# Altium PCB pcb.PcbDoc (part 6 of 6)
Units mm, origin at the board's own origin, x right, y up, seen from the top; angles counter-clockwise.
Board outline 85.44 x 182.72 mm, 2 copper layers (Top Layer, Bottom Layer); 68 components, 54 nets, 232 pads, 184 vias.
Unrouted connection lines stored in the file: 53.
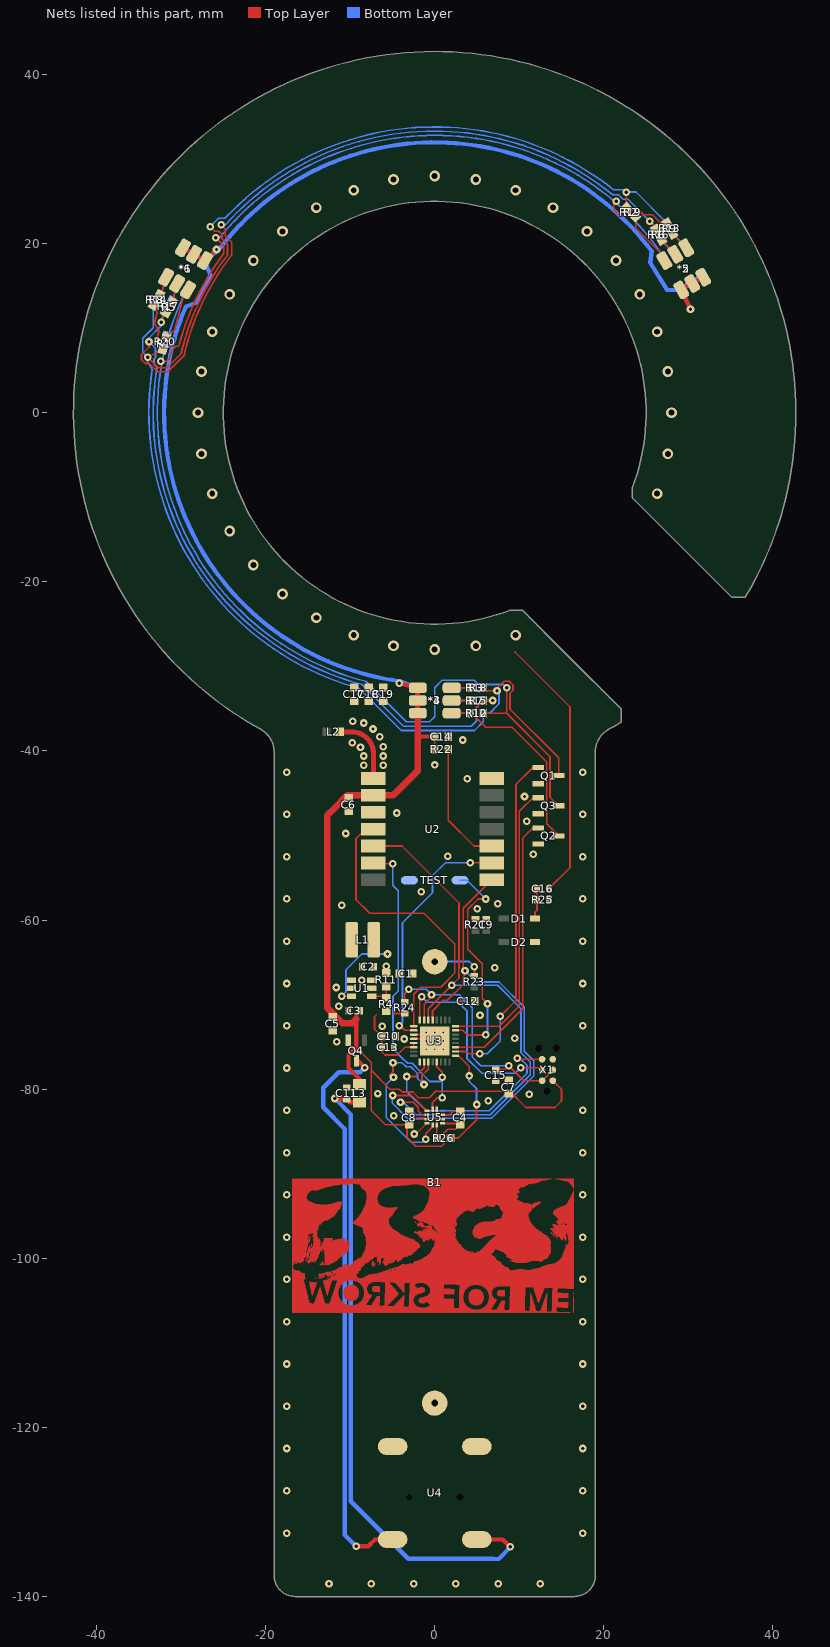
[diagram p6: the nets of this part, all layers, seen from the top]

## Via types
v1: diameter 0.9, hole 0.4, Top Layer to Bottom Layer, 143 vias
v2: diameter 1.27, hole 0.7, Top Layer to Bottom Layer, 32 vias
v3: diameter 0.5, hole 0.2, Top Layer to Bottom Layer, 9 vias

## Nets (pads, with @x,y where several pads share a name; then routed paths per layer and width w, separated by ;. In a path a pad name is that pad's centre, name@x,y a point inside that pad or via, vN(x,y) a via of type N, cw(c..) or ccw(c..) an arc to the next point about the centre after c; other vN are vias at no path point) (continued)
GND: (continued)
  Top Layer w0.025: 16.388,-105.807 16.464,-105.807 ; 16.388,-105.782 16.464,-105.782 ; 16.388,-105.756 16.464,-105.756 ; 16.388,-105.731 16.464,-105.731 ; 16.388,-105.705 16.464,-105.705 ; 16.388,-105.68 16.464,-105.68 ; 16.388,-105.655 16.464,-105.655 ; 16.388,-105.629 16.464,-105.629 ; 16.388,-105.604 16.464,-105.604 ; 16.388,-105.578 16.464,-105.578 ; 16.388,-105.553 16.464,-105.553 ; 16.388,-105.528 16.464,-105.528 ; 16.388,-105.502 16.464,-105.502 ; 16.388,-105.477 16.464,-105.477 ; 16.388,-105.451 16.464,-105.451 ; 16.388,-105.426 16.464,-105.426 ; 16.388,-105.401 16.464,-105.401 ; 16.388,-105.375 16.464,-105.375 ; 16.388,-92.091 16.464,-92.091 ; 16.388,-92.066 16.464,-92.066 ; 16.388,-91.608 16.464,-91.608 ; 16.388,-91.583 16.464,-91.583 ; 16.413,-105.35 16.464,-105.35 ; 16.413,-105.324 16.464,-105.324 ; 16.413,-105.299 16.464,-105.299 ; 16.413,-105.274 16.464,-105.274 ; 16.413,-105.248 16.464,-105.248 ; 16.413,-105.223 16.464,-105.223 ; 16.413,-105.197 16.464,-105.197 ; 16.413,-105.172 16.464,-105.172 ; 16.413,-105.147 16.464,-105.147 ; 16.413,-105.121 16.464,-105.121 ; 16.413,-105.096 16.464,-105.096 ; 16.413,-105.07 16.464,-105.07 ; 16.413,-105.045 16.464,-105.045 ; 16.413,-105.02 16.464,-105.02 ; 16.413,-104.994 16.464,-104.994 ; 16.413,-104.969 16.464,-104.969 ; 16.413,-104.943 16.464,-104.943 ; 16.413,-104.918 16.464,-104.918 ; 16.413,-104.893 16.464,-104.893 ; 16.413,-104.867 16.464,-104.867 ; 16.413,-104.842 16.464,-104.842 ; 16.413,-104.816 16.464,-104.816 ; 16.413,-104.791 16.464,-104.791 ; 16.413,-104.766 16.464,-104.766 ; 16.413,-104.74 16.464,-104.74 ; 16.413,-104.715 16.464,-104.715 ; 16.413,-104.689 16.464,-104.689 ; 16.413,-104.664 16.464,-104.664 ; 16.413,-92.04 16.464,-92.04 ; 16.413,-92.015 16.464,-92.015 ; 16.413,-91.659 16.464,-91.659 ; 16.413,-91.634 16.464,-91.634 ; 16.439,-104.639 16.464,-104.639 ; 16.439,-104.613 16.464,-104.613 ; 16.439,-104.588 16.464,-104.588 ; 16.439,-104.562 16.464,-104.562 ; 16.439,-104.537 16.464,-104.537 ; 16.439,-104.512 16.464,-104.512 ; 16.439,-104.486 16.464,-104.486 ; 16.439,-104.461 16.464,-104.461 ; 16.439,-104.435 16.464,-104.435 ; 16.439,-104.41 16.464,-104.41 ; 16.439,-104.385 16.464,-104.385 ; 16.439,-104.359 16.464,-104.359 ; 16.439,-104.334 16.464,-104.334 ; 16.439,-104.308 16.464,-104.308 ; 16.439,-104.283 16.464,-104.283 ; 16.439,-104.258 16.464,-104.258 ; 16.439,-104.232 16.464,-104.232 ; 16.439,-104.207 16.464,-104.207 ; 16.439,-104.181 16.464,-104.181 ; 16.439,-104.156 16.464,-104.156 ; 16.439,-104.131 16.464,-104.131 ; 16.439,-104.105 16.464,-104.105 ; 16.439,-104.08 16.464,-104.08 ; 16.439,-104.054 16.464,-104.054 ; 16.439,-104.029 16.464,-104.029 ; 16.439,-104.004 16.464,-104.004 ; 16.439,-103.978 16.464,-103.978 ; 16.439,-103.953 16.464,-103.953 ; 16.439,-103.927 16.464,-103.927 ; 16.439,-91.989 16.464,-91.989 ; 16.439,-91.964 16.464,-91.964 ; 16.439,-91.761 16.464,-91.761 ; 16.439,-91.735 16.464,-91.735 ; 16.439,-91.71 16.464,-91.71 ; 16.439,-91.685 16.464,-91.685
  Top Layer w0.2: C10.1@-4.634,-73.887 C10.1@-4.534,-73.787 ; U3.28@-2.475,-74.045 U3.33@-0.25,-74.045 ; U3.27@-2.475,-73.545 -0.75,-73.545 U3.33@-0.25,-74.045 ; v1(-2.4,-85.3) -2.217,-85.3 -0.967,-84.05 U5.4@-0.925,-84.05 ; v3(0,-74.295) U3.33@-0.25,-74.045 ; U5.11@0.25,-82.375 0.25,-83.029 ; U5.8@0.925,-83.55 0.263,-83.55 0.25,-83.537 0.25,-83.029 ; C4.1@3,-82.6 2.16,-82.6 1.71,-83.05 U5.9@0.925,-83.05 0.271,-83.05 0.25,-83.029
  other v1: -12.5,-138.5 -7.5,-138.5 -2.5,-138.5 2.5,-138.5 7.5,-138.5 12.5,-138.5 -17.5,-132.5 17.5,-132.5 -17.5,-127.5 17.5,-127.5 -17.5,-122.5 17.5,-122.5 -17.5,-117.5 17.5,-117.5 -17.5,-112.5 17.5,-112.5 -17.5,-107.5 17.5,-107.5 -17.5,-102.5 17.5,-102.5 -17.5,-97.5 17.5,-97.5 -17.5,-92.5 17.5,-92.5 -17.5,-87.5 17.5,-87.5 -4.826,-83.134 -17.5,-82.5 17.5,-82.5 6.325,-81.35 11.201,-80.62 -6.731,-80.518 -17.5,-77.5 17.5,-77.5 -11.582,-74.397 -3.581,-74.066 9.45,-74 -6.198,-72.542 -17.5,-72.5 17.5,-72.5 5.359,-71.247 -11.328,-70.206 -11.633,-67.97 -17.5,-67.5 17.5,-67.5 -8.636,-67.107 7.112,-65.659 -5.74,-65.481 -17.5,-62.5 17.5,-62.5 5.029,-58.649 -10.973,-58.268 7.468,-58.064 -17.5,-57.5 17.5,-57.5 -1.575,-56.667 -17.5,-52.5 17.5,-52.5 1.524,-52.451 11.659,-52.222 -10.541,-49.759 10.871,-48.336 -17.5,-47.5 17.5,-47.5 -4.496,-47.346 10.617,-45.39 3.861,-43.282 -17.5,-42.5 17.5,-42.5 -8.4,-41.7 -6.1,-41.7 0,-41.656 -8.4,-40.6 -6.1,-40.6 -8.776,-39.566 -6.1,-39.5 -9.729,-39.016 3.302,-38.71 -6.5,-38.3 -7.3,-37.4 -8.4,-36.7 -9.7,-36.5
  other v3: -1,-75.295 0,-75.295 1,-75.295 -1,-74.295 1,-74.295 -1,-73.295 0,-73.295 1,-73.295
INT: U2.11 U3.25 | length 36.7
  Top Layer w0.2: U2.11@-7.25,-49.25 -8.15,-49.25 -9.3,-50.4 -9.3,-57.578 -7.696,-59.182 -1.27,-59.182 2.388,-62.84 2.388,-66.268 0.71,-67.945 -1.651,-67.945 -2.475,-68.769 U3.25@-2.475,-72.545
INT1: U3.3 U5.5 | length 23.5
  Top Layer w0.2: v1(-4.928,-76.86) -4.928,-77.953 -5.334,-78.359 -5.105,-78.588 v1(-4.877,-78.588) ; v1(-1.27,-79.451) -1.499,-79.223 -1.499,-78.384 -0.75,-77.636 U3.3@-0.75,-76.77 ; v1(-1.067,-85.903) -1.067,-85.268 -0.25,-84.451 U5.5@-0.25,-84.225
  Bottom Layer w0.2: v1(-4.928,-76.86) -3.861,-76.86 -3.371,-77.35 -2.824,-77.35 -2.025,-78.149 -2.025,-78.696 v1(-1.27,-79.451) ; v1(-4.877,-78.588) -5.728,-79.439 -5.728,-83.349 -2.794,-86.284 -1.448,-86.284 v1(-1.067,-85.903)
INT2: R26.2 U5.6 | length 1.6
  Top Layer w0.2: R26.2@0.165,-85.827 0.25,-85.742 U5.6@0.25,-84.225
IRQ: U2.2 U3.26 | length 29.2
  Top Layer w0.2: v1(-4.191,-72.517) -4.064,-72.517 -3.536,-73.045 U3.26@-2.475,-73.045 ; v1(4.191,-53.213) 6.713,-53.213 U2.2@6.75,-53.25
  Bottom Layer w0.2: v1(-4.191,-72.517) -3.81,-72.136 -3.81,-60.325 -0.254,-56.769 -0.254,-54.737 1.27,-53.213 v1(4.191,-53.213) v1@4.064,-53.34
LED_B: Q3.3 R8.2 R9.2 R10.2 R18.2 R19.2 R20.2 | length 181.9
  Top Layer w0.2: R8.2@-33.158,12.51 -32.801,11.893 -33.145,10.61 -32.606,9.677 -32.873,8.679 -32.672,8.331 -30.684,7.798 -30.593,7.85 ; v1@-32.224,5.827 -31.41,6.297 -31.141,7.302 -30.593,7.85 ; v1(-25.908,20.696) -24.936,19.724 -24.936,18.858 ccw(c0,0) -30.262,7.85 -30.593,7.85 ; R10.2@5.753,-35.56 8.509,-35.56 ; v1(8.509,-32.512) 8.509,-35.56 ; Q3.3@14.662,-46.482 13.637,-45.457 13.637,-40.688 8.509,-35.56 ; v1(21.463,24.994) 21.158,24.994 21.158,24.054 21.894,23.318 22.739,23.318 23.551,24.13 23.953,24.13 24.683,23.399 25.761,23.399 26.7,22.461 R9.2@27.413,22.461
  Bottom Layer w0.2: R20.2@-31.958,7.383 ccw(c0,0) -8.165,-31.767 -3.376,-36.557 -0.616,-36.557 0,-35.941 0,-32.512 0.862,-31.65 4.665,-31.65 5.207,-32.192 5.207,-33.058 R18.2@5.753,-32.512 6.122,-32.143 8.14,-32.143 v1(8.509,-32.512) ; v1(-25.908,20.696) -25.652,20.44 cw(c0,0) R19.2@22.373,23.985
  other v1: -32.377,6.091
LED_G: Q2.3 R5.2 R6.2 R7.2 R15.2 R16.2 R17.2 | length 186.8
  Top Layer w0.2: v1(-33.782,8.382) -33.782,7.77 -34.672,6.88 -34.672,6.258 -34.233,5.819 -33.759,5.819 -32.766,4.826 -31.556,4.826 -29.667,6.715 -29.649,6.715 cw(c0,0) -24.016,18.638 -24.003,18.651 -24.003,20.193 -24.758,20.948 -24.758,21.728 v1(-25.264,22.234) ; v1(-32.34,10.716) R5.2@-32.105,11.593 ; R5.2@-31.769,11.753 -31.769,12.465 ; v1(6.858,-34.036) R7.2@5.753,-34.036 4.953,-34.836 4.953,-36.134 6.03,-37.211 9.144,-37.211 13.237,-41.304 13.237,-48.613 Q2.3@14.662,-50.038 ; v1(25.451,22.649) 26.092,22.008 R6.2@26.092,21.724
  Bottom Layer w0.2: R17.2@-31.847,11.712 ccw(c-31.474,11.066) -32.195,11.259 v1(-32.34,10.716) -32.34,10.281 -33.782,8.839 v1(-33.782,8.382) -33.02,7.62 -33.02,6.528 -33.198,6.35 -33.198,5.717 -32.842,5.362 ccw(c-0.087,-0.05) -8.636,-32.13 ; v1(-25.264,22.234) -24.745,22.234 cw(c0,0.1) 21.065,25.761 ; -8.636,-32.131 -3.683,-37.084 4.318,-37.084 4.953,-36.449 4.953,-34.836 R15.2@5.753,-34.036 v1(6.858,-34.036) ; 21.081,25.781 21.742,25.781 22.276,25.248 22.852,25.248 v1(25.451,22.649) 25.848,22.252 cw(c25.32,21.724) R16.2@26.067,21.724
LED_R: Q1.3 R1.2 R2.2 R3.2 R12.2 R13.2 R14.2 | length 184.7
  Top Layer w0.2: R1.2@-32.36,7.471 v1(-33.922,6.569) -32.687,5.334 -31.653,5.334 -29.996,6.991 cw(c0,0) -24.499,18.666 -24.499,19.927 -25.158,20.586 -25.158,21.094 -25.527,21.463 -26.035,21.463 v1(-26.543,21.971) ; R3.2@5.753,-32.512 6.134,-32.893 v1(7.366,-32.893) 7.366,-32.594 8.198,-31.762 8.82,-31.762 9.259,-32.201 9.259,-32.823 8.909,-33.173 8.909,-35.071 14.662,-40.824 Q1.3@14.662,-42.926 ; R2.2@22.345,24.289 R2.2@22.65,24.289 v1(22.65,26.093)
  Bottom Layer w0.2: v1@-34.264,6.661 v1(-33.922,6.569) -34.532,7.179 -34.532,8.8 -33.293,10.039 R14.2@-33.293,12.642 ; v1@-34.027,6.175 -33.412,5.109 ccw(c0,0) -9.001,-32.58 -8.949,-32.58 -3.937,-37.592 4.699,-37.592 5.753,-36.538 R12.2@5.753,-35.535 6.502,-35.535 7.608,-34.429 7.608,-33.135 v1(7.366,-32.893) ; v1(-26.543,21.971) -26.543,22.016 -25.572,22.987 -24.813,22.987 -23.771,24.028 cw(c0,0) 21.13,26.381 22.362,26.381 v1(22.65,26.093) 23.8,26.093 R13.2@27.4,22.493
LOOP: C16.1 C17.2 C18.2 C19.2 | length 31.7
  Top Layer w0.2: 9.5,-28.3 16,-34.8 16,-53.8 C16.1@13.5,-56.3
  other v2: 0,-28 -4.862,-27.575 4.862,-27.575 -9.577,-26.311 9.577,-26.311 -14,-24.249 -17.998,-21.449 -21.449,-17.998 -24.249,-14 -26.311,-9.577 26.311,-9.577 -27.575,-4.862 27.575,-4.862 -28,0 28,0 -27.575,4.862 27.575,4.862 -26.311,9.577 26.311,9.577 -24.249,14 24.249,14 -21.449,17.998 21.449,17.998 -17.998,21.449 17.998,21.449 -14,24.249 14,24.249 -9.577,26.311 9.577,26.311 -4.862,27.575 4.862,27.575 0,28
MISO: U2.1 U3.21 U5.1 | length 62.5
  Top Layer w0.2: v1(-4.978,-80.747) -2.732,-80.747 -0.929,-82.55 U5.1@-0.925,-82.55 ; U3.21@-0.25,-71.82 -0.25,-70.735 0.991,-69.494 1.499,-69.494 3.378,-67.615 3.378,-66.675 3.581,-66.472 v1(3.581,-65.989) ; v1@3.378,-65.989 3.378,-58.622 U2.1@6.75,-55.25
  Bottom Layer w0.2: v1(-4.978,-80.747) -5.029,-80.797 -5.029,-81.636 -3.232,-83.433 6.726,-83.433 11.71,-78.448 11.71,-76.626 10.6,-75.516 10.6,-70.315 7.602,-67.316 4.909,-67.316 v1(3.581,-65.989)
MOSI: U2.12 U3.22 U5.2 | length 67.8
  Top Layer w0.2: U2.12@-7.25,-51.25 -3.868,-51.25 2.87,-57.988 2.87,-65.64 2.831,-65.679 2.831,-66.3 2.87,-66.339 2.87,-66.853 v1(2.007,-67.716) -0.75,-70.473 U3.22@-0.75,-71.82 ; v1(-4.039,-81.534) -2.54,-81.534 -1.93,-82.144 -1.93,-82.575 -1.456,-83.05 U5.2@-0.925,-83.05
  Bottom Layer w0.2: v1(-4.039,-81.534) -3.734,-81.534 -2.235,-83.033 6.56,-83.033 11.31,-78.283 11.31,-76.791 10.2,-75.681 10.2,-70.48 7.436,-67.716 v1(2.007,-67.716)
Net*1_1: *1.1 R8.1 | length 2.2
  Top Layer w0.2: R8.1@-32.358,13.896 -32.334,13.985 *1.1@-31.79,16.017
Net*1_2: *1.2 R5.1 | length 2.2
  Top Layer w0.2: R5.1@-31.06,13.12 -31.049,13.16 -31.026,13.247 *1.2@-30.483,15.271
Net*1_3: *1.3 R1.1 | length 6.1
  Top Layer w0.2: R1.1@-31.946,9.016 -31.874,9.058 -31.679,9.17 -30.802,9.677 *1.3@-29.563,14.302
Net*2_1: *2.1 R9.1 | length 2.2
  Top Layer w0.2: R9.1@28.213,21.075 29.766,19.522 *2.1@29.766,19.495
Net*2_2: *2.2 R6.1 | length 2.2
  Top Layer w0.2: R6.1@26.892,20.338 28.467,18.764 *2.2@28.467,18.745
Net*2_3: *2.3 R2.1 | length 6.6
  Top Layer w0.2: R2.1@23.781,23.158 23.781,21.837 27.168,18.451 *2.3@27.168,17.995
Net*3_1: *3.1 R10.1 | length 2.2
  Top Layer w0.2: *3.1@2,-35.525 2.035,-35.56 R10.1@4.153,-35.56
Net*3_2: *3.2 R7.1 | length 2.2
  Top Layer w0.2: *3.2@2,-34.025 2.011,-34.036 R7.1@4.153,-34.036
Net*3_3: *3.3 R3.1 | length 2.2
  Top Layer w0.2: *3.3@2,-32.525 2.013,-32.512 R3.1@4.153,-32.512
Net*4_1: *4.1 R18.1 | length 2.2
  Bottom Layer w0.2: *4.1@2,-32.55 2.038,-32.512 R18.1@4.153,-32.512
Net*4_2: *4.2 R15.1 | length 2.2
  Bottom Layer w0.2: *4.2@2,-34.05 2.014,-34.036 R15.1@4.153,-34.036
Net*4_3: *4.3 R12.1 | length 2.2
  Bottom Layer w0.2: *4.3@2,-35.55 2.015,-35.535 R12.1@4.153,-35.535
Net*5_1: *5.1 R19.1 | length 6
  Bottom Layer w0.2: R19.1@23.499,22.839 cw(c0,-0.044) *5.1@27.257,18.201
Net*5_2: *5.2 R16.1 | length 2.3
  Bottom Layer w0.2: R16.1@26.8,20.307 cw(c26.8,20.139) 26.919,20.258 *5.2@28.445,18.732
Net*5_3: *5.3 R13.1 | length 2.3
  Bottom Layer w0.2: R13.1@28.2,21.107 29.744,19.563 *5.3@29.744,19.482
Net*6_1: *6.1 R20.1 | length 6.8
  Bottom Layer w0.2: R20.1@-31.529,8.932 cw(c0.038,0.022) *6.1@-29.391,14.505 ; *6.1@-29.337,13.77 -29.306,13.801 -29.201,13.801 *6.1@-29.201,14.518
Net*6_2: *6.2 R17.1 | length 2.8
  Bottom Layer w0.2: R17.1@-31.003,13.184 -30.989,13.237 *6.2@-30.5,15.062 ; *6.2@-30.5,14.675 *6.2@-30.5,15.062 ; *6.2@-30.5,15.268 *6.2@-30.5,15.062 ; *6.2@-30.445,15.268 -30.449,15.254 *6.2@-30.5,15.062
Net*6_3: *6.3 R14.1 | length 2.7
  Bottom Layer w0.2: R14.1@-32.379,13.868 -32.349,13.98 -32.347,13.989 *6.3@-31.814,15.977 ; *6.3@-31.799,15.458 *6.3@-31.799,16.018
NetC11_2: C11.2 L3.1 U4.1 | length 78.1
  Top Layer w0.5: v1(-11.811,-81.102) -11.713,-81.2 C11.2@-10.4,-81.2 -10.05,-81.55 L3.1@-8.9,-81.55 ; U4.1@4.975,-133.25 8.053,-133.25 v1(8.915,-134.112)
  Bottom Layer w0.5: v1(-11.811,-81.102) -9.931,-82.982 -9.931,-128.727 -3.124,-135.534 6.883,-135.534 6.909,-135.56 7.569,-135.56 8.915,-134.214 v1(8.915,-134.112)
NetC16_2: C16.2 D1.1 R25.2 | length 3.6
  Top Layer w0.2: D1.1@11.864,-59.817 11.864,-59.057 12.1,-58.821 R25.2@12.1,-57.6 C16.2@12.1,-56.3
NetL1_2: L1.2 U1.1
NetL2_1: L2.1 U2.8 | length 8.4
  Top Layer w0.6: L2.1@-11.2,-37.75 -9.79,-37.75 cw(c-9.79,-40.29) -7.25,-40.29 U2.8@-7.25,-43.25
NetQ4_3: Q4.3 U4.2 U4.3 U4.4 | length 67.8
  Top Layer w0.5: v1(-9.296,-134.061) -7.861,-134.061 -7.05,-133.25 U4.4@-4.975,-133.25 ; Q4.3@-9.271,-76.638 -9.062,-76.638 v1(-8.255,-77.445) ; U4.3@-5.025,-122.2 U4.3@-4.975,-122.25
  Bottom Layer w0.5: v1(-9.296,-134.061) -10.631,-132.726 -10.631,-84.695 -13.183,-82.144 -13.183,-79.832 -11.354,-78.003 -8.814,-78.003 v1(-8.255,-77.445)
NetR4_1: R4.1 R11.2 U1.4 | length 3.1
  Top Layer w0.2: U1.4@-7.436,-69.022 -5.87,-69.022 R4.1@-5.715,-69.177 R11.2@-5.715,-67.856
NetR22_1: R22.1 U2.3 | length 14.8
  Top Layer w0.2: R22.1@1.6,-39.8 1.6,-48.2 4.65,-51.25 U2.3@6.75,-51.25
NetR26_1: R26.1 U3.9 | length 12.8
  Top Layer w0.2: R26.1@1.867,-85.776 2.798,-85.776 4.953,-83.621 v1(4.953,-81.813) ; U3.9@2.475,-76.045 2.811,-76.045 4.089,-77.324 4.089,-78.41 v1(4.064,-78.435)
  Bottom Layer w0.2: v1(4.064,-78.435) 4.064,-79.045 4.953,-79.934 v1(4.953,-81.813)
NetSW1_1: TEST.1 U3.15 | length 26.3
  Top Layer w0.2: U3.15@2.475,-73.045 2.495,-73.025 3.302,-73.025 3.861,-73.584 v1(6.045,-73.584) ; v1(6.02,-57.506) 5.112,-57.506 3.912,-58.706 3.912,-63.449 5.639,-65.176 5.639,-69.266 v1(6.248,-69.875)
  Bottom Layer w0.2: TEST.1@3,-55.3 3.814,-55.3 v1(6.02,-57.506) ; v1(6.045,-73.584) 6.248,-73.381 v1(6.248,-69.875)
NetU3_24: U3.24 X1.4 | length 25
  Top Layer w0.2: U3.24@-1.75,-71.82 -1.75,-69.314 v1(-1.524,-69.088) ; v1(10.16,-77.47) 12.446,-77.47 X1.4@12.7,-77.724
  Bottom Layer w0.2: v1(-1.524,-69.088) -0.889,-69.723 2.794,-69.723 3.81,-70.739 3.81,-76.327 5.588,-78.105 9.525,-78.105 v1(10.16,-77.47) ; v1(10.16,-77.47) 10.287,-77.343 10.287,-77.597 v1(10.16,-77.47)
PWM_B: Q3.1 U3.16 | length 34.5
  Top Layer w0.2: U3.16@2.475,-72.545 7.637,-72.545 10.014,-70.168 10.014,-47.136 11.618,-45.532 Q3.1@12.262,-45.532
PWM_G: Q2.1 U3.11 | length 32.4
  Top Layer w0.2: U3.11@2.475,-75.045 5.854,-75.045 10.414,-70.485 10.414,-50.292 11.618,-49.088 Q2.1@12.262,-49.088
PWM_R: Q1.1 U3.10 | length 41.2
  Top Layer w0.2: U3.10@2.475,-75.545 3.79,-75.545 4.064,-75.819 v1(5.334,-75.819) ; Q1.1@12.262,-41.976 11.593,-41.976 9.614,-43.955 9.614,-69.507 v1(7.747,-71.374) ; v1(7.747,-71.374) 7.62,-71.501 7.62,-71.247 v1(7.747,-71.374)
  Bottom Layer w0.2: v1(5.334,-75.819) 6.223,-75.819 7.747,-74.295 v1(7.747,-71.374)
RST: C15.2 R24.1 U3.23 X1.2 X1.3 | length 32.2
  Top Layer w0.2: R24.1@-3.556,-69.658 -3.556,-68.707 v1(-3.048,-68.199) ; U3.23@-1.25,-71.82 -1.25,-69.957 -0.381,-69.088 v1(-0.381,-68.834) ; C15.2@7.239,-77.659 8.32,-77.659 v1(8.763,-77.216) 10.541,-78.994 X1.2@12.7,-78.994 X1.3@13.97,-77.724
  Bottom Layer w0.2: v1(-3.048,-68.199) -1.016,-68.199 v1(-0.381,-68.834) 2.921,-68.834 4.445,-70.358 4.445,-76.2 5.461,-77.216 v1(8.763,-77.216)
RXD: U3.1
SCK: U2.13 U3.5 U5.12 | length 39.9
  Top Layer w0.2: U2.13@-7.25,-53.25 -7.16,-53.34 v1(-4.953,-53.34) ; U5.12@-0.25,-82.375 -0.25,-81.55 0.3,-81 v1(0.9,-81) ; U3.5@0.25,-76.77 0.25,-77.361 0.9,-78.011 v1(0.9,-78.6)
  Bottom Layer w0.2: v1(-4.953,-53.34) -4.953,-55.88 -4.318,-56.515 -4.318,-68.384 -4.941,-69.007 -4.941,-75.221 -3.702,-76.46 -3.695,-76.46 -3.206,-76.95 -2.658,-76.95 -1.625,-77.983 -1.625,-78.036 -0.559,-79.102 0.688,-79.102 v1@0.9,-78.89 ; v1(0.9,-81) 0.9,-81.121 0.661,-81.361 0.661,-81 0.9,-80.761 v1@0.9,-78.89 ; v1(0.9,-78.6) v1@0.9,-78.89
TXD: U3.2 X1.6 | length 27.4
  Top Layer w0.2: v1(-3.3,-78.5) -2.3,-78.5 -1.25,-77.45 U3.2@-1.25,-76.77 ; v1(9.779,-76.327) 9.906,-76.454 X1.6@12.7,-76.454
  Bottom Layer w0.2: v1(-3.3,-78.5) -3.3,-80.3 -1.037,-82.563 6.464,-82.563 10.91,-78.117 10.91,-77.159 10.078,-76.327 v1(9.779,-76.327)
VBAT: B1.2 C1.2 C2.2 L1.1 R23.2 U1.3 U1.6 | length 16.3
  Top Layer w0.2: v1(-11,-69) -9.858,-69 cw(c-9.858,-69.022) U1.3@-9.836,-69.022 ; R23.2@4.699,-66.61 v1(4.699,-65.532)
  Bottom Layer w0.2: v1(-11,-69) -10.5,-68.5 -10.5,-65.9 -8.608,-64.008 v1(-5.588,-64.008) v1@-5.5,-63.92 ; B1.2@0,-64.9 4.067,-64.9 v1(4.699,-65.532)
VCPU: *1.4 *1.5 *1.6 *2.4 *2.5 *2.6 *3.4 *3.5 *3.6 *4.4 *4.5 *4.6 *5.4 *5.5 *5.6 *6.4 *6.5 *6.6 C3.2 C4.2 C5.2 C6.2 C7.2 C8.2 C10.2 C13.2 C14.2 L3.2 R4.2 R22.2 R24.2 U1.5 U2.9 U3.29 U3.30 U5.3 U5.7 X1.1 | length 291
  Top Layer w0.2: -9.271,-75.387 -8.995,-75.663 -8.69,-75.663 -7.505,-76.848 -7.505,-77.781 ; -6.896,-71.234 -7.112,-71.45 -7.112,-72.911 C10.2@-6.286,-73.736 -6.286,-74.982 C13.2@-6.237,-75.032 -6.237,-75.608 -5.884,-75.961 -4.435,-75.961 -3.519,-75.045 U3.30@-2.475,-75.045 U3.29@-2.475,-74.545 ; -4.826,-71.058 R24.2@-3.556,-71.058 ; U5.3@-0.925,-83.55 -2.35,-83.55 C8.2@-3,-84.2 ; R22.2@0,-39.8 C14.2@0,-38.3 ; U5.7@0.925,-84.05 2.85,-84.05 C4.2@3,-84.2 2.466,-84.734 1.534,-84.734 1.067,-85.202 1.067,-86.487 0.813,-86.741 -2.235,-86.741 -3.277,-85.7 -3.277,-84.477 C8.2@-3,-84.2 ; X1.1@13.97,-78.994 14.986,-80.01 14.986,-81.407 14.224,-82.169 10.795,-82.169 8.876,-80.25 0.123,-80.25 -0.628,-81.001 -1.912,-81.001 -2.573,-80.34 -3.835,-80.34 -4.179,-79.997 -5.289,-79.997 -7.505,-77.781 ; -7.505,-77.781 -7.505,-82.513 -5.818,-84.2 C8.2@-3,-84.2
  Top Layer w0.5: *1.6@-29.744,19.482 *1.5@-28.445,18.732 *1.4@-27.146,17.982 v1(-25.8,19.3) ; -9.271,-75.387 -9.271,-75.027 ; L3.2@-8.9,-79.45 -8.9,-78.8 -10.2,-77.5 -10.2,-75.956 -9.271,-75.027 ; C3.2@-8.825,-70.739 -9.271,-71.185 -9.271,-71.7 -9.271,-75.027 ; v1(-4.2,-32) *3.4@-2,-32.525 *3.5@-2,-34.025 *3.6@-2,-35.525 ; -2,-38.3 C14.2@0,-38.3 ; v1(30.25,12.25) *2.4@29.168,14.53 *2.5@30.467,15.28 *2.6@31.766,16.03
  Top Layer w0.8: -9.271,-71.7 -9.771,-72.2 -10.9,-72.2 -12.7,-70.4 -12.7,-47.6 -12,-46.9 -10.35,-45.25 U2.9@-7.25,-45.25 -4.95,-45.25 -2,-42.3 -2,-38.3 *3.6@-2,-35.525
  Bottom Layer w0.5: *6.4@-29.799,19.482 *6.5@-28.5,18.732 *6.6@-27.201,17.982 ; v1@-25.685,19.151 *6.6@-27.201,17.982 ; v1@-25.571,19.213 cw(c0,-0.025) 25.658,19.098 ; v1@-4.118,-31.734 cw(c0,0) -29.426,12.575 -28.25,13 -26.5,16.25 *6.6@-27.201,17.982 ; v1@-4.1,-31.741 *4.6@-2,-32.55 *4.5@-2,-34.05 *4.4@-2,-35.55 ; 25.66,19.12 25.658,19.098 ; v1(30.25,12.25) *5.6@29.146,14.518 ; *5.4@31.744,16.018 31.195,16.018 *5.5@30.445,15.268 29.896,15.268 *5.6@29.146,14.518 ; 25.658,19.098 25.5,17.75 27.482,14.518 *5.6@29.146,14.518
pads on no net: U2.4 U2.5 U2.6 U3.8 U3.12 U3.13 U3.14 U3.18 U3.19 U3.20 U3.32 U4.0 X1.A X1.B X1.C

## Polygon pours and split planes (outlines as drawn)
GND on Top Layer "NONET_L01_P-001" (solid, pour order 23): -12.273,-40.473 -11.1,-39.3 -11.1,-33.9 -10.7,-33.5 -9.6,-33.5 -5.3,-33.5 -4.9,-33.9 -2.6,-36.2 -2.6,-37.7 -2.6,-39.8 -4.1,-41.3
LOOP on Top Layer "NONET_L01_P-001" (solid, pour order 19): -13.2,-27.8 -11.1,-29.9 -11.1,-32.7 -10.7,-33.1 -5.3,-33.1 -4.9,-32.7 -4.9,-29.824
GND on Top Layer "GND_L01_P015" (solid, remove dead copper, pour order 15): -19,-40 -5.5,-40 -3.5,-38 -2.5,-37 3.5,-37 16,-37 19,-40 19,-137.46 cw(c16.46,-137.46) 16.46,-140 14.5,-140 -16.5,-140 cw(c-16.5,-137.5) -19,-137.5
NetL1_2 on Top Layer "NETL1_2_L01_P013" (solid, pour order 13): -8.636,-60.198 -9.017,-59.817 -10.287,-59.817 -11.43,-59.817 -11.938,-60.325 -11.938,-66.675 -11.176,-67.437 -9.271,-67.437 -9.271,-66.04 -9.271,-65.024 -8.636,-64.389
VCPU on Top Layer "VCPU_L01_P011" (solid, pour order 11): -8.255,-67.818 -6.477,-67.818 -6.477,-68.453 -6.604,-68.58 -7.62,-68.58 -8.001,-68.58 -8.128,-68.707 -8.128,-69.469 -8.001,-69.596 -7.239,-69.596 -6.985,-69.596 -6.604,-69.977 -5.334,-69.977 -4.953,-69.977 -4.699,-70.231 -4.699,-71.12 -4.699,-71.628 -5.08,-72.009 -6.35,-72.009 -9.271,-72.009 -9.525,-71.755 -9.525,-71.501 -9.525,-70.358 -9.525,-69.85 -9.085,-69.41 -9.085,-68.89 -8.499,-68.2 -8.499,-68.062
VBAT on Top Layer "VBAT_L01_P009" (solid, pour order 9): -8.382,-60.198 -8.001,-59.817 -1.143,-59.817 1.524,-62.484 2.159,-63.119 2.159,-66.04 2.159,-66.548 1.143,-67.564 -0.889,-67.564 -2.936,-67.564 -3.4,-67.1 -3.4,-65.2 -3.818,-64.77 -4.953,-64.77 -6.096,-64.77 -6.477,-65.151 -6.477,-66.04 -6.477,-67.31 -8.001,-67.31 -8.001,-66.167 -8.001,-65.278 -8.001,-64.897 -8.382,-64.516
LOOP on Top Layer "LOOP_L01_P003" (solid, pour order 3): -31.441,-0.059 cw(c0.03,-0.06) 0.031,31.411 cw(c0.031,-0.059) 31.5,-0.059 cw(c0.031,-0.059) 0.031,-31.527 cw(c0.028,-0.058)
no net on Top Solder "NONET_L01_P-001" (solid): 2.15,-77.6 3.3,-76.45 3.3,-72.05 2.25,-71 -2.25,-71 -2.75,-71.5 -3.3,-72.05 -3.3,-76.45 -2.15,-77.6
no net on Top Solder "NONET_L01_P-001" (solid): -1.7,-82.4 -1,-81.7 1,-81.7 1.7,-82.4 1.7,-84.2 1,-84.9 -1,-84.9 -1.7,-84.2
no net on Top Solder "ANT_L01_P-001" (solid): -29,0 cw(c0,0) 0,29 cw(c0,0) 29,0 cw(c0,0) 0,-29 cw(c-0.001,-0.001)
no net on Top Solder "NONET_L01_P-001" (solid): 19,-40 17.5,-40 16.5,-41 16.5,-55.3 16.5,-134.96 cw(c13.96,-134.96) 13.96,-137.5 10.8,-137.5 -13.96,-137.5 cw(c-13.96,-134.96) -16.5,-134.96 -16.5,-129.9 -16.5,-41 -17.5,-40 -19,-40 -19,-137.5 ccw(c-16.5,-137.5) -16.5,-140 16.5,-140 ccw(c16.5,-137.5) 19,-137.5
no net on Bottom Solder "ANT_L01_P-001" (solid): -29,0 cw(c0,0) 0,29 cw(c0,0) 29,0 cw(c0,0) 0,-29 cw(c-0.001,-0.001)
no net on Bottom Solder "NONET_L01_P-001" (solid): 19,-40 17.5,-40 16.5,-41 16.5,-55.3 16.5,-134.96 cw(c13.96,-134.96) 13.96,-137.5 10.8,-137.5 -13.96,-137.5 cw(c-13.96,-134.96) -16.5,-134.96 -16.5,-129.9 -16.5,-41 -17.5,-40 -19,-40 -19,-137.5 ccw(c-16.5,-137.5) -16.5,-140 16.5,-140 ccw(c16.5,-137.5) 19,-137.5
GND on Bottom Layer "NONET_L01_P-001" (solid, pour order 21): -13,-40.3 -12,-39.3 -12,-34.8 -10.7,-33.5 -8.029,-33.5 -3.937,-37.592 -3.937,-39.263 -2.9,-40.3
GND on Bottom Layer "GND_L02_P017" (solid, remove dead copper, pour order 17): -19,-40 19,-40 19,-137.5 cw(c16.5,-137.5) 16.5,-140 -16.5,-140 cw(c-16.5,-137.5) -19,-137.5
LOOP on Bottom Layer "LOOP_L02_P005" (solid, pour order 5): -31.441,-0.059 cw(c0.03,-0.06) 0.031,31.411 cw(c0.031,-0.059) 31.5,-0.059 cw(c0.031,-0.059) 0.031,-31.527 cw(c0.028,-0.058)

## Other copper
Top Layer:
  pour cut-out: -2.003,-81.88 -1.403,-81.28 1.397,-81.28 1.997,-81.88 1.997,-84.58 1.497,-85.08 -1.403,-85.08 -2.003,-84.48
  pour cut-out: -2.1,-70.8 2.8,-70.8 3.8,-71.8 3.8,-77.099 2.799,-78.1 -1.4,-78.1 -1.6,-77.9
  pour cut-out: -16.861,-90.592 -16.861,-106.391 16.464,-106.391 16.464,-90.592
  pour cut-out: 16.027,-29.027 10.3,-23.3 8.5,-23.3 8.5,-22.2 22.6,-8.1 23.368,-8.868 23.368,-10.068 23.7,-10.4 29.127,-15.827
  pour cut-out: -25,0 cw(c0,0) 0,25 cw(c0,0) 25,0 cw(c0.004,-0.004) 0,-25 cw(c0,0)
Bottom Layer:
  rectangle net GND: 11.6,-116.8 12.2,-85
  rectangle net GND: 11.3,-116.6 15.5,-115.9
  rectangle net GND: 14.4,-116.6 15.1,-83.9
  rectangle net GND: 11.4,-85.3 15.8,-84.2
  pour cut-out: 16.027,-29.027 10.3,-23.3 8.5,-23.3 8.5,-22.2 22.6,-8.1 23.368,-8.868 23.368,-10.068 23.7,-10.4 29.127,-15.827
  pour cut-out: -25,0 cw(c0,0) 0,25 cw(c0,0) 25,0 cw(c0.004,-0.004) 0,-25 cw(c0,0)
  text "Designed by Niklas Fauth 2016" at 13.8,-85.3 h3 r90

## Silkscreen, mask and mechanical layers (free items; w line width, h text height)
Top Solder:
  pour cut-out: -25,0 cw(c0,0) 0,25 cw(c0,0) 25,0 cw(c0.004,-0.004) 0,-25 cw(c0,0)
Bottom Solder:
  pour cut-out: -25,0 cw(c0,0) 0,25 cw(c0,0) 25,0 cw(c0.004,-0.004) 0,-25 cw(c0,0)
Mechanical 1:
  lines w0.35: -20.457,-37.528 cw(c-22,-40.1) -19,-40.1 -19,-137.5 ccw(c-16.5,-137.5) -16.5,-140 16.5,-140 ccw(c16.5,-137.5) 19,-137.5 19,-40.1 cw(c22,-40.1) 20.457,-37.528 ; -20.447,-37.509 cw(c0,0) 36.799,-21.699 36.698,-21.8 35.1,-21.8 23.45,-10.15 23.375,-10.075 23.375,-8.866 ccw(c0,0) 8.941,-23.346 10.346,-23.346 15.5,-28.5 22.055,-35.055 22.055,-36.591 cw(c0,0) 20.448,-37.513
Mechanical 13:
  lines w0.254: 24.928,-37.52 25.288,-37.879 ; 25.826,-36.262 25.108,-37.699 ; 26.545,-36.981 25.108,-37.699 ; 28.498,-34.309 25.108,-37.699 ; 34.818,-27.989 38.208,-24.599 ; 36.771,-25.318 38.208,-24.599 ; 37.49,-26.036 38.208,-24.599 ; 38.028,-24.42 38.388,-24.779
  text "18.526" at 29.324,-34.776 h1.52 r45

## Dimensions
-42.72,0 to 42.72,0 on Mechanical 13
-25,0 to 25,0 on Mechanical 13